# Altium PCB ScrollWheel.PcbDoc
Units mm, origin at the board's own origin, x right, y up, seen from the top; angles counter-clockwise.
Board outline 38 x 48.55 mm, 4 copper layers (Top Layer, Plane 1, Plane 2, Bottom Layer), stack 1.58 mm thick; 56 components, 31 nets, 220 pads, 122 vias.
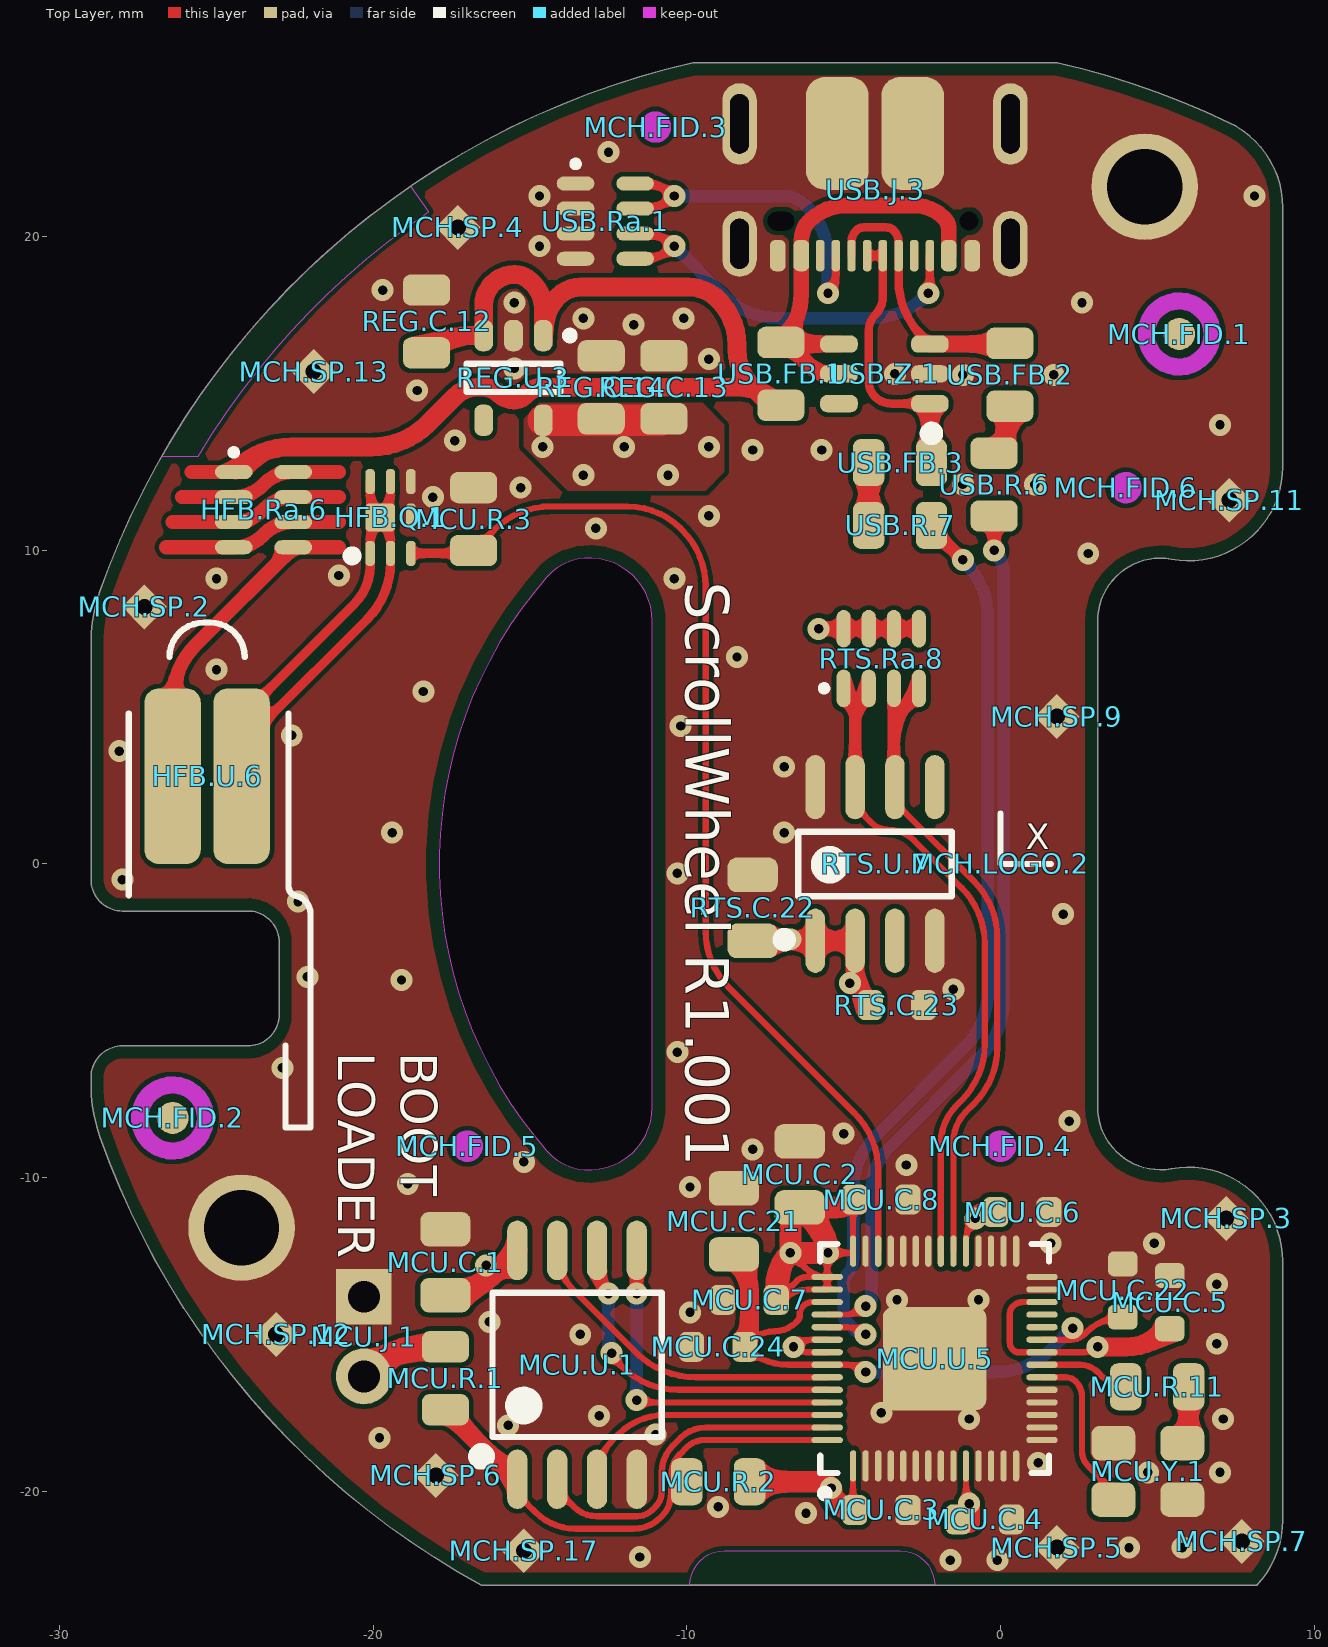
[diagram p0: Top Layer view]
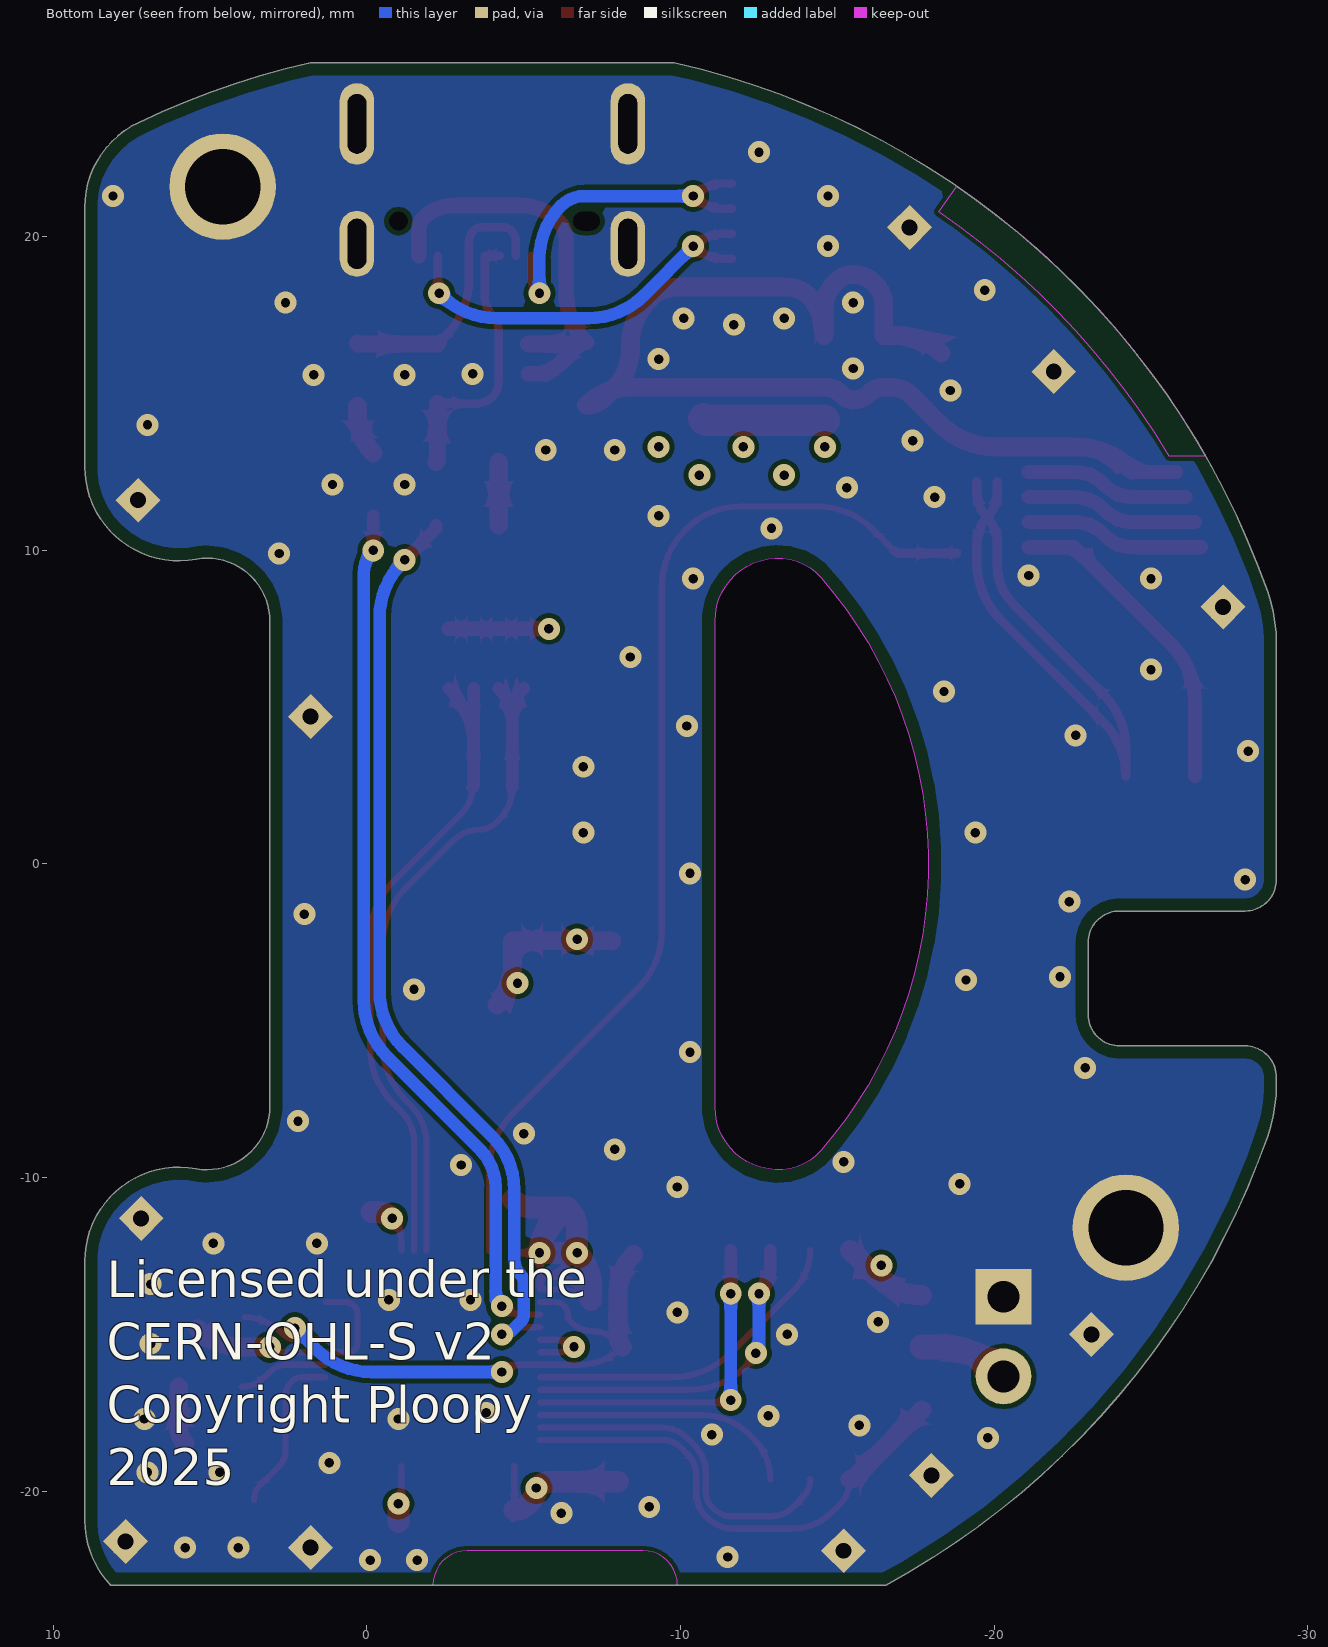
[diagram p1: Bottom Layer view, seen from below]
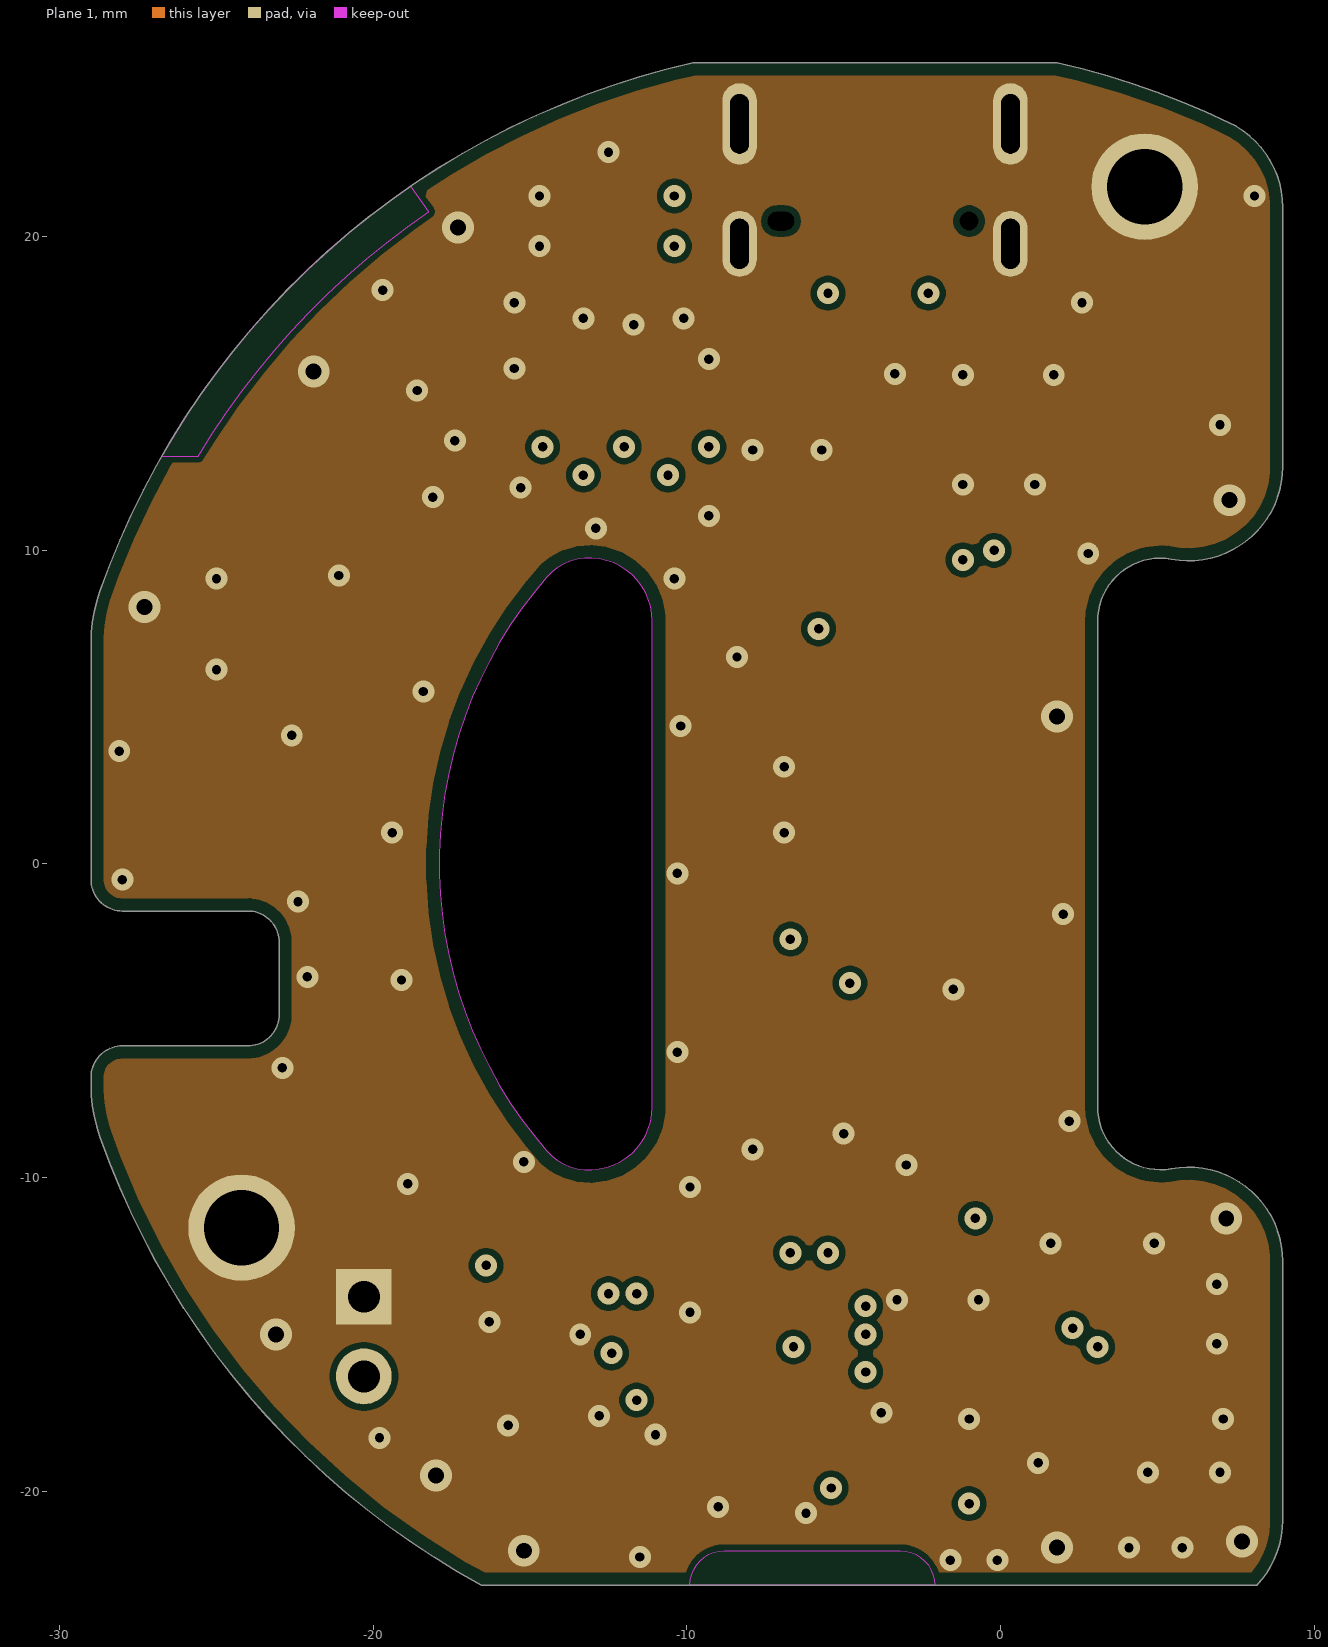
[diagram p2: Plane 1]
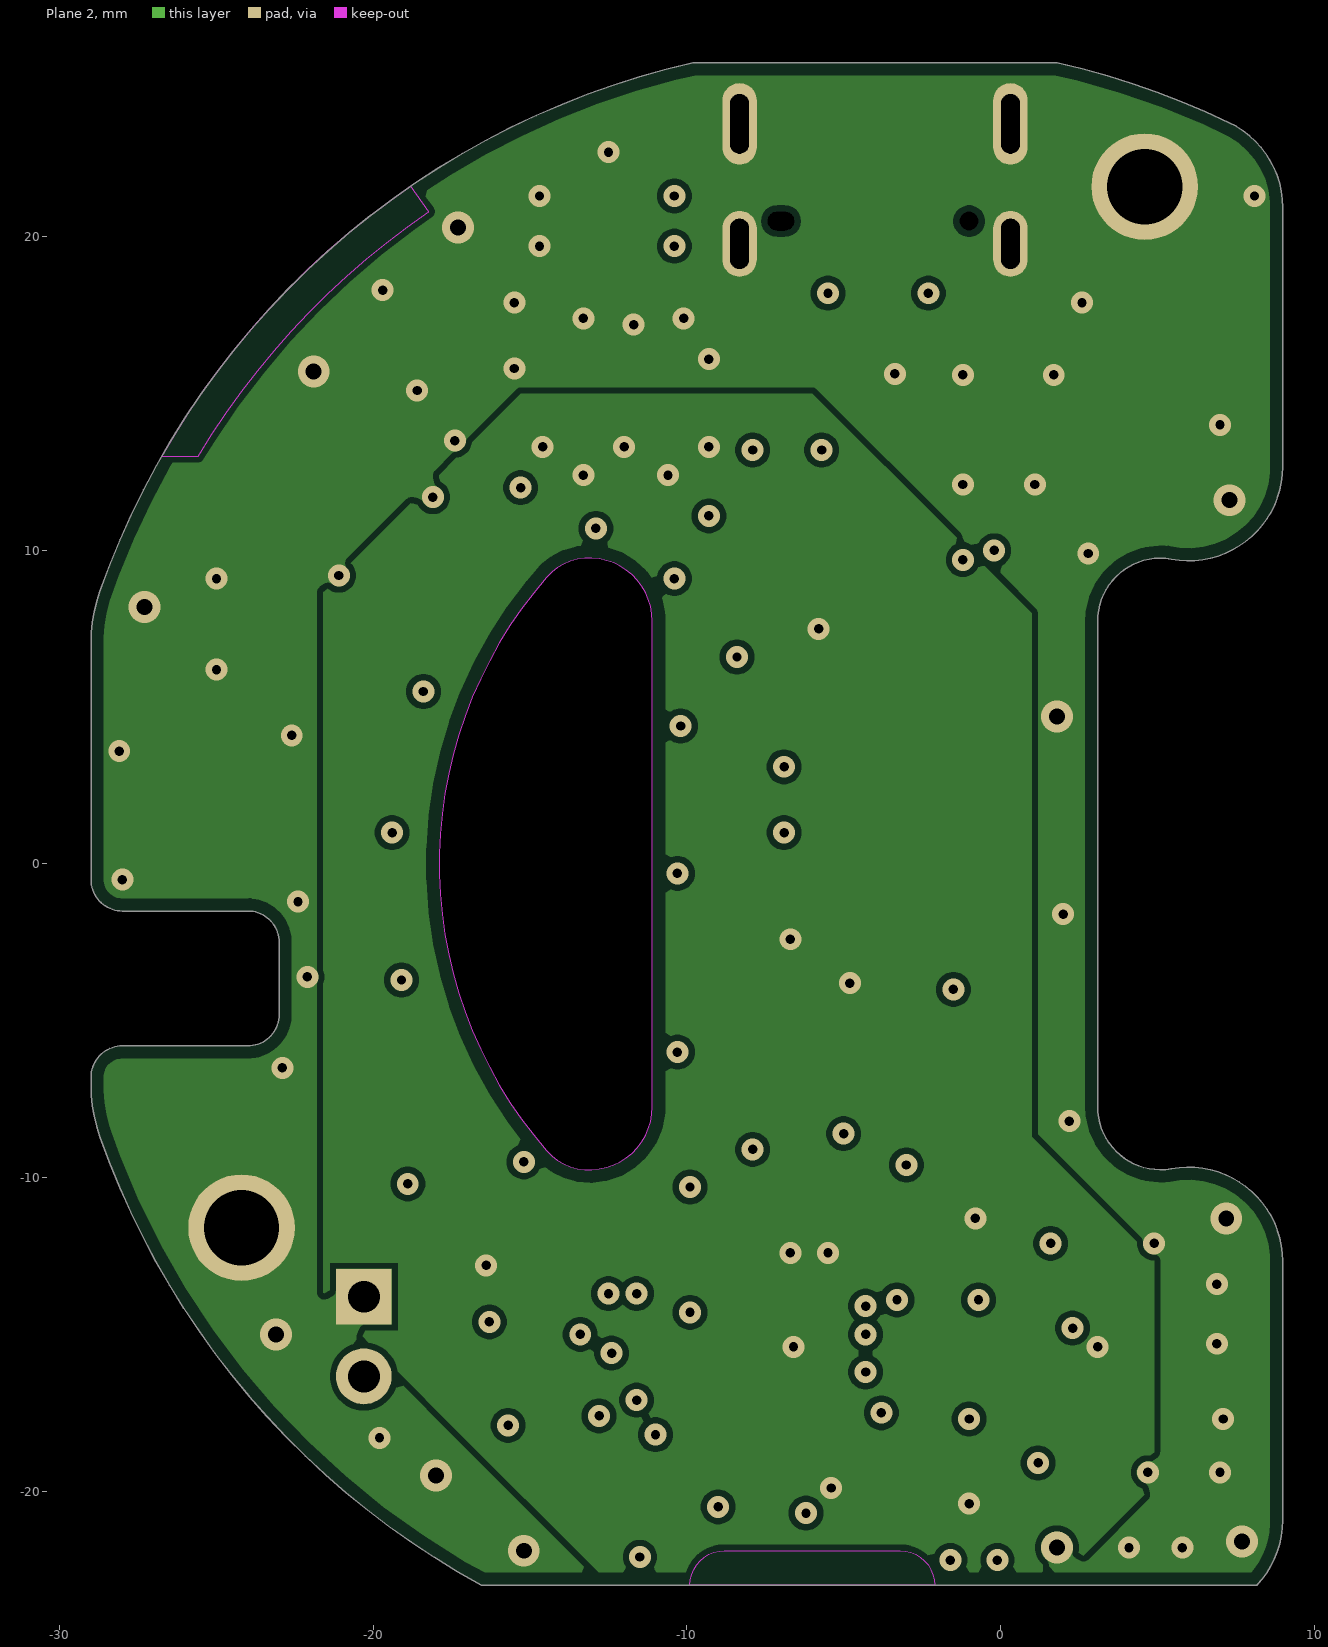
[diagram p3: Plane 2]

## Layer stack, top to bottom
Top Mask: solder mask 0.01, Solder Resist, Dk 3.5
Top Layer: signal copper 0.036
Dielectric 1: prepreg 0.127, FR-4, Dk 4.2
Plane 1: signal copper 0.036
Dielectric 4: core 1.182, Dk 4.2
Plane 2: signal copper 0.036
Dielectric 2: prepreg 0.127, Dk 4.2
Bottom Layer: signal copper 0.036
Bottom Solder: solder mask 0.01, Solder Resist, Dk 3.5

## Board outline
-28.717,-8.69 cw(c-24,-7.031) -29,-7.031 -29,-6.8 cw(c-28,-6.8) -28,-5.8 -24,-5.8 ccw(c-24,-4.8) -23,-4.8 -23,-2.5 ccw(c-24,-2.5) -24,-1.5 -28,-1.5 cw(c-28,-0.5) -29,-0.5 -29,7.031 cw(c-24,7.031) -28.717,8.69 cw(c-4,0) -9.802,25.55 1.802,25.55 cw(c-4,0) 7.293,23.641 cw(c6,20.934) 9,20.934 9,12.669 cw(c6,12.669) 5.451,9.72 ccw(c5.121,7.951) 5.262,9.745 ccw(c5.105,7.746) 3.1,7.746 3.1,-7.746 ccw(c5.105,-7.746) 5.262,-9.745 ccw(c5.121,-7.951) 5.451,-9.72 cw(c6,-12.669) 9,-12.669 9,-20.934 cw(c6,-20.934) 8.175,-23 -16.548,-23 cw(c-4,0)
cut-out: -14.478,-9.133 ccw(c-13.121,-7.951) -13.262,-9.745 ccw(c-13.105,-7.746) -11.1,-7.746 -11.1,7.746 ccw(c-13.105,7.746) -13.262,9.745 ccw(c-13.121,7.951) -14.478,9.133 ccw(c-4,0)

## Design rules (kind name [scope] priority, off if disabled: settings)
BoardOutlineClearance [(Not HasFootprint('SPARKGAP'))] p1: gap=0.4 ignorepadtopadclearanceinfootprint=FALSE except(0: Arc-SplitBarrior Arc-SplitContinuation Track-SplitBarrior Track-SplitContinuation Fill-SplitBarrior Fill-SplitContinuation Poly-SplitBarrior Poly-SplitContinuation Region-SplitBarrior Region-SplitContinuation Text-SplitBarrior Text-SplitContinuation)
Clearance "HighV Pads" [(InNetClass('HighV') AND (IsPad OR IsVia)) vs IsPad OR IsVia] p1: gap=0.4 ignorepadtopadclearanceinfootprint=FALSE except(0: Arc-Hole Track-Hole SMDPad-Hole THPad-Hole Via-Hole Fill-Hole Poly-Hole Region-Hole Text-Hole) // Establishes minimum clearance between bare pads that are high voltage, per IPC2221A Table 6-1, 51-100V, condition A6
Clearance Inter-Pad [IsPad vs IsPad] p2: gap=0.15 ignorepadtopadclearanceinfootprint=FALSE
Clearance "Spark Gaps" [InNetClass('Spark Gap') vs InNet('GND') And InPoly] p3: gap=0.635 ignorepadtopadclearanceinfootprint=FALSE except(0: Arc-Hole Track-Hole SMDPad-Hole THPad-Hole Via-Hole Fill-Hole Poly-Hole Region-Hole Text-Hole)
Clearance FIDs [Name like 'FID*'] p4: gap=1.016 ignorepadtopadclearanceinfootprint=FALSE except(0: Arc-Hole Track-Hole SMDPad-Hole THPad-Hole Via-Hole Fill-Hole Poly-Hole Region-Hole Text-Hole)
Clearance "Inner Planes" [InPoly AND OnMid] p5: gap=0.2 ignorepadtopadclearanceinfootprint=FALSE // Defines a larger clearance for planes on inner layers.
Clearance "All Planes" [InPoly] p6: gap=0.15 ignorepadtopadclearanceinfootprint=FALSE // Defines minimum clearance between planes on the same layer.
Clearance "Inner Layer Clearance" [OnMid vs OnMid] p7: gap=0.15 ignorepadtopadclearanceinfootprint=FALSE // We will give inner layers more spacing because they tend to be subject to stricter process limits.
Clearance [All] p8: gap=0.1 ignorepadtopadclearanceinfootprint=FALSE // 2 oz (70um) boards require at least 10mil spacing. We give a bit more to make sure things work well.
ComponentClearance "Terminal Block" [(HasFootprint('Phoenix 1933189 - Header')) vs (HasFootprint('Phoenix 1933189 - Header'))] p1: gap=-2.286 collisioncheckmode=3 verticalgap=0.254 showdistances=FALSE
ComponentClearance "FET/TP self Clearance" [(Name like 'Q*') Or (Name like 'TP*') vs (Name like 'Q*') Or (Name like 'TP*')] p2: gap=0.254 collisioncheckmode=3 verticalgap=0.254 showdistances=FALSE
ComponentClearance [Not ((Name like 'H*') Or (Name like 'FID*') Or (Name like 'SP*')) vs Not ((Name like 'H*') Or (Name like 'FID*') Or (Name like 'SP*'))] p3: gap=0.5 collisioncheckmode=3 verticalgap=0.5 showdistances=FALSE
DiffPairsRouting [All] p1: maxlimit=0.508 minlimit=0.279 mostfreqgap=0.381 toplayer_prefgap=0.279 toplayer_minwidth=0.279 toplayer_maxwidth=0.508 toplayer_prefwidth=0.381 midlayer2_mingap=0.305 midlayer2_minwidth=0.305 midlayer2_maxwidth=0.508 midlayer2_prefwidth=0.381 midlayer3_prefgap=0.279 midlayer3_minwidth=0.279 midlayer3_maxwidth=0.508 midlayer3_prefwidth=0.381 bottomlayer_prefgap=0.279 bottomlayer_minwidth=0.279 bottomlayer_maxwidth=0.508 bottomlayer_prefwidth=0.381 substack1={D919DD2D-F60F-4B9F-B5AE-F3E69D6E268F} toplayer_{d919dd2d-f60f-4b9f-b5ae-f3e69d6e268f}_minwidth=0.381 toplayer_{d919dd2d-f60f-4b9f-b5ae-f3e69d6e268f}_maxwidth=0.381 toplayer_{d919dd2d-f60f-4b9f-b5ae-f3e69d6e268f}_prefwidth=0.381 midlayer2_{d919dd2d-f60f-4b9f-b5ae-f3e69d6e268f}_minwidth=0.381 midlayer2_{d919dd2d-f60f-4b9f-b5ae-f3e69d6e268f}_maxwidth=0.381 midlayer2_{d919dd2d-f60f-4b9f-b5ae-f3e69d6e268f}_prefwidth=0.381 midlayer3_{d919dd2d-f60f-4b9f-b5ae-f3e69d6e268f}_minwidth=0.381 midlayer3_{d919dd2d-f60f-4b9f-b5ae-f3e69d6e268f}_maxwidth=0.381 midlayer3_{d919dd2d-f60f-4b9f-b5ae-f3e69d6e268f}_prefwidth=0.381 bottomlayer_{d919dd2d-f60f-4b9f-b5ae-f3e69d6e268f}_minwidth=0.381 bottomlayer_{d919dd2d-f60f-4b9f-b5ae-f3e69d6e268f}_maxwidth=0.381 bottomlayer_{d919dd2d-f60f-4b9f-b5ae-f3e69d6e268f}_prefwidth=0.381 maxuncoupledlength=12.7
Height [All] p1: minheight=0 maxheight=41 prefheight=12.7
HoleSize [All] p1: absolutevalues=TRUE maxlimit=100 minlimit=0.3 maxpercent=80.000 minpercent=20.000
HoleToHoleClearance [All] p1: gap=0.6 allowstackedmicrovias=TRUE
LayerPairs [All] p1: enforce=FALSE
MinimumSolderMaskSliver [All] p1: minsoldermaskwidth=0.09
NetAntennae [Not (HasFootprint('BALANCE_RESISTOR'))] p1: netantennaetolerance=0
PasteMaskExpansion [All] p1: expansion=-0.025
PlaneClearance [All] p1: clearance=0.3
PlaneConnect [All] p1: pad.planeconnectstyle=Relief pad.reliefexpansion=0.5 pad.reliefentries=4 pad.reliefconductorwidth=0.5 pad.reliefairgap=0.25 via.planeconnectstyle=Direct via.reliefexpansion=0.5 via.reliefentries=4 via.reliefconductorwidth=0.5 via.reliefairgap=0.25
PolygonConnect "PolygonConnect Spark Gap" [HasFootprint('SparkGap')] p1: connectstyle=Direct reliefconductorwidth=0.254 reliefentries=4 polygonreliefangle="90 Angle" airgapwidth=0.254 // This rule makes it so spark gaps get direct connections to ground planes.
PolygonConnect PolygonConnect_GND [All vs InNet('GND')] p2: connectstyle=Direct reliefconductorwidth=0.5 reliefentries=4 polygonreliefangle="90 Angle" airgapwidth=0.25 // This rule specifies all vias and holes connected to a GND plane have direct connections.
PolygonConnect [All] p3: connectstyle=Direct reliefconductorwidth=0.5 reliefentries=4 polygonreliefangle="90 Angle" airgapwidth=0.25
RoutingVias [All] p1: holewidth=0.5 width=1 viastyle="Through Hole" minholewidth=0.2 minwidth=0.5 maxholewidth=6 maxwidth=10
ShortCircuit [Not (InPadClass('TraceResistorPads')) vs Not (InPadClass('TraceResistorPads'))] p1: allowed=FALSE
SilkToBoardRegionClearance [All] p1 off:
SilkToSilkClearance [All] p1 off: silktosilkclearance=0.254
SilkToSolderMaskClearance SilkscreenOverComponentPads [IsPad] p1: minsilkscreentomaskgap=0.102 clearancetoexposedcopper=FALSE
SolderMaskExpansion SolderMaskExpansion_via [IsVia] p1: expansion=0.102 istentingtop=TRUE
SolderMaskExpansion [All] p2: expansion=0.076 istentingtop=FALSE
Width [All] p1: maxlimit=50.8 minlimit=0.1 preferedwidth=0.4 midlayer2_minwidth=0.35 midlayer3_minwidth=0.35 bottomlayer_minwidth=0.26 substack1={D919DD2D-F60F-4B9F-B5AE-F3E69D6E268F} toplayer_{d919dd2d-f60f-4b9f-b5ae-f3e69d6e268f}_minwidth=0.26 midlayer2_{d919dd2d-f60f-4b9f-b5ae-f3e69d6e268f}_minwidth=0.35 midlayer3_{d919dd2d-f60f-4b9f-b5ae-f3e69d6e268f}_minwidth=0.35 bottomlayer_{d919dd2d-f60f-4b9f-b5ae-f3e69d6e268f}_minwidth=0.26 minimp=50.000000 maximp=50.000000 favimp=50.000000
15 further rules are at their usual default settings.

## Classes and differential pairs
component class RTS: RTS.C.22 RTS.C.23 RTS.Ra.8 RTS.U.7
component class HFB: HFB.Q.1 HFB.Ra.6 HFB.U.6
component class USB: USB.FB.1 USB.FB.2 USB.FB.3 USB.J.3 USB.R.6 USB.R.7 USB.Ra.1 USB.Z.1
component class REG: REG.C.12 REG.C.13 REG.C.14 REG.U.3
component class MCU: MCU.C.1 MCU.C.2 MCU.C.3 MCU.C.4 MCU.C.5 MCU.C.6 MCU.C.7 MCU.C.8 MCU.C.21 MCU.C.22 MCU.C.24 MCU.J.1 MCU.R.1 MCU.R.2 MCU.R.3 MCU.R.11 MCU.U.1 MCU.U.5 MCU.Y.1
component class MCH: MCH.FID.1 MCH.FID.2 MCH.FID.3 MCH.FID.4 MCH.FID.5 MCH.FID.6 MCH.LOGO.2 MCH.SP.2 MCH.SP.3 MCH.SP.4 MCH.SP.5 MCH.SP.6 MCH.SP.7 MCH.SP.9 MCH.SP.11 MCH.SP.12 MCH.SP.13 MCH.SP.17

## Components (designator, comment, footprint, x,y, rotation, side; value= is the part's Value field where it differs from the comment)
HFB.Q.1 "CSD16301Q2" "CSD16301Q2 - SON65P200X80_HS-7M" -19.45,11.05 r90 top (schematic designator Q1)
HFB.Ra.6 "1206 Quad" "4x 1R 5% - CAC-80P320X160-8M" -23.5,11.3 r0 top value="1R 5%" (schematic designator Ra6)
HFB.U.6 "MOTOR-VIBRATORY" MOTOR-VIBRATORY -25,0.5 r90 top (schematic designator U6)
MCH.FID.1 "IPC-7351 Fiducial 1mm" FIDUCIAL_1.5 5.7,16.9 r90 top (schematic designator FID1)
MCH.FID.2 "IPC-7351 Fiducial 1mm" FIDUCIAL_1.5 -26.4,-8.1 r90 top (schematic designator FID2)
MCH.FID.3 "1mm Fiducial for OpenPNP" FIDUCIAL-NEW -11,23.5 r90 top (schematic designator FID3)
MCH.FID.4 "1mm Fiducial for OpenPNP" FIDUCIAL-NEW 0,-9 r90 top (schematic designator FID4)
MCH.FID.5 "1mm Fiducial for OpenPNP" FIDUCIAL-NEW -17,-9 r90 top (schematic designator FID5)
MCH.FID.6 "1mm Fiducial for OpenPNP" FIDUCIAL-NEW 4,12 r90 top (schematic designator FID6)
MCH.LOGO.2 "Coordinate system marker for assembly" "COORDINATE SYSTEM" 0,0 r0 top (schematic designator LOGO2)
MCH.SP.2 "Spark Gap" SparkGap -27.3,8.2 r90 top (schematic designator SP2)
MCH.SP.3 "Spark Gap" SparkGap 7.2,-11.3 r90 top (schematic designator SP3)
MCH.SP.4 "Spark Gap" SparkGap -17.3,20.3 r90 top (schematic designator SP4)
MCH.SP.5 "Spark Gap" SparkGap 1.8,-21.8 r90 top (schematic designator SP5)
MCH.SP.6 "Spark Gap" SparkGap -18,-19.5 r90 top (schematic designator SP6)
MCH.SP.7 "Spark Gap" SparkGap 7.7,-21.6 r90 top (schematic designator SP7)
MCH.SP.9 "Spark Gap" SparkGap 1.8,4.7 r90 top (schematic designator SP9)
MCH.SP.11 "Spark Gap" SparkGap 7.3,11.6 r90 top (schematic designator SP11)
MCH.SP.12 "Spark Gap" SparkGap -23.1,-15 r90 top (schematic designator SP12)
MCH.SP.13 "Spark Gap" SparkGap -21.9,15.7 r90 top (schematic designator SP13)
MCH.SP.17 "Spark Gap" SparkGap -15.2,-21.9 r90 top (schematic designator SP17)
MCU.C.1 "0805 X5R" "0805 - TALL" -17.7,-12.7 r0 top value="1uF 25V" (schematic designator C1)
MCU.C.2 "0805 X5R" "0805 - TALL" -6.4,-9.9 r0 top value="1uF 25V" (schematic designator C2)
MCU.C.3 "0603 X5R" "0603 capacitor - CAPC1608X06N" -3.8,-20.6 r90 top value="0.1uF 25V" (schematic designator C3)
MCU.C.4 "0603 X5R" "0603 capacitor - CAPC1608X06N" -0.5,-20.9 r90 top value="0.1uF 25V" (schematic designator C4)
MCU.C.5 "0603 X5R" "0603 capacitor - CAPC1608X06N" 5.4,-13.97 r180 top value="0.1uF 25V" (schematic designator C5)
MCU.C.6 "0603 X5R" "0603 capacitor - CAPC1608X06N" 0.7,-11.1 r90 top value="0.1uF 25V" (schematic designator C6)
MCU.C.7 "0603 X5R" "0603 capacitor - CAPC1608X06N" -8,-13.9 r270 top value="0.1uF 25V" (schematic designator C7)
MCU.C.8 "0603 X5R" "0603 capacitor - CAPC1608X06N" -3.8,-10.7 r90 top value="0.1uF 25V" (schematic designator C8)
MCU.C.21 "0805 X5R" "0805 - TALL" -8.5,-11.4 r0 top value="1uF 25V" (schematic designator C21)
MCU.C.22 "0603 X5R" "0603 capacitor - CAPC1608X06N" 3.9,-13.6 r180 top value="0.1uF 25V" (schematic designator C22)
MCU.C.24 "0603 X5R" "0603 capacitor - CAPC1608X06N" -9,-15.4 r270 top value="0.1uF 25V" (schematic designator C24)
MCU.J.1 "HEADER2" 2x1 -20.3,-13.8 r0 top (schematic designator J1)
MCU.R.1 "0805" 0805 -17.7,-16.4 r0 top value="1k 1%" (schematic designator R1)
MCU.R.2 "0805" 0805 -9,-19.7 r270 top value="10k 1%" (schematic designator R2)
MCU.R.3 "0805" 0805 -16.8,11 r180 top value="10k 1%" (schematic designator R3)
MCU.R.11 "0805" 0805 5,-16.67 r90 top value="1k 1%" (schematic designator R11)
MCU.U.1 "W25Q16JVSSIQ" "W25Q128JVS - SOIC127P790X216-8M" -13.5,-15.97 r90 top (schematic designator U1)
MCU.U.5 "RP2040" "RP2040 - QFN40P700X700X90_HS-57M" -2.1,-15.77 r90 top (schematic designator U5)
MCU.Y.1 "RH100-12.000-16-3030" RH100-12.000-16-3030 4.7,-19.37 r0 top (schematic designator Y1)
REG.C.12 "0805" 0805 -18.3,17.3 r0 top value="1uF 25V" (schematic designator C12)
REG.C.13 "0805" 0805 -10.73,15.2 r0 top value="10uF 25V" (schematic designator C13)
REG.C.14 "0805" 0805 -12.73,15.2 r0 top value="1uF 25V" (schematic designator C14)
REG.U.3 "AP2202K-3.3" "AP2202 - SOT95P270X145-5N" -15.53,15.5 r270 top (schematic designator U3)
RTS.C.22 "0805 X5R" "0805 - TALL" -7.9,-1.4 r0 top value="10uF 25V" (schematic designator C22)
RTS.C.23 "0603 X5R" "0603 capacitor - CAPC1608X06N" -3.3,-4.5 r90 top value="0.1uF 25V" (schematic designator C23)
RTS.Ra.8 "1206 Quad" "4x 10k 1% - CAC-80P320X160-8M" -3.8,6.55 r90 top value="10k 1%" (schematic designator Ra8)
RTS.U.7 "AS5600" AS5600 -4,0 r90 top (schematic designator U7)
USB.FB.1 "ACML-0805-601-T" 0805 -7,15.63 r0 top (schematic designator FB1)
USB.FB.2 "ACML-0805-601-T" 0805 0.3,15.6 r0 top (schematic designator FB2)
USB.FB.3 "ACML-0805-601-T" 0805 -3.2,12.8 r270 top (schematic designator FB3)
USB.J.3 "DX07S016JA1R1500" DX07S016JA1R1500 -4,22.4 r180 top (schematic designator J3)
USB.R.6 "0805" 0805 -0.2,12.1 r0 top value="22R 1%" (schematic designator R6)
USB.R.7 "0805" 0805 -3.2,10.8 r90 top value="22R 1%" (schematic designator R7)
USB.Ra.1 "1206 Quad" "4x 10k 1% - CAC-80P320X160-8M" -12.6,20.5 r0 top value="10k 1%" (schematic designator Ra1)
USB.Z.1 "IP4220CZ6,125" "PESD3V3S4UD - SOT95P275X110-6N" -3.7,15.63 r180 top (schematic designator Z1)

## Footprints (in the part's own frame and the unit in brackets; to place one, negate y for a bottom-side part, rotate by r counter-clockwise, add the part's x,y. Pads: shape width x height; smd on the part's side, far side on the other; paste and mask are expansions set on the pad)
2x1 [mil]
  rect 70x70 hole 40 paste-3897.64: 1(0,0)
  round 70 hole 40 paste-3897.64: 2(0,-100)
"4x 1R 5% - CAC-80P320X160-8M" [mm] "Chip Array, Concave, 8-Leads, Pitch 0.80mm,  Body 3.20x1.60mm,  IPC Low Density"
  oval 1.2x0.45 smd paste-99: 1(-0.95,1.2) 2(-0.95,0.4) 3(-0.95,-0.4) 4(-0.95,-1.2) 5(0.95,-1.2) 6(0.95,-0.4) 7(0.95,0.4) 8(0.95,1.2)
  silkscreen extent -1,1.78 -0.9,1.87, body extent -0.9,-1.7 0.9,1.7, height 0.6
"4x 10k 1% - CAC-80P320X160-8M" [mm] "Chip Array, Concave, 8-Leads, Pitch 0.80mm,  Body 3.20x1.60mm,  IPC Low Density"
  oval 1.2x0.45 smd paste-99: 1(-0.95,1.2) 2(-0.95,0.4) 3(-0.95,-0.4) 4(-0.95,-1.2) 5(0.95,-1.2) 6(0.95,-0.4) 7(0.95,0.4) 8(0.95,1.2)
  silkscreen extent -1,1.78 -0.9,1.87, body extent -0.9,-1.7 0.9,1.7, height 0.6
"0603 capacitor - CAPC1608X06N" [mm] "Chip Capacitor, 2-Leads, Body 1.60x0.80mm, IPC Medium Density"
  rrect50% 0.95x0.8 smd: 1(0,-0.85) 2(0,0.85)
  body extent -0.45,-0.85 0.45,0.85, height 0.6
0805 [mm] "Chip Capacitor, 2-Leads, Body 2.0x1.3mm, IPC Medium Density"
  rrect50% 1.5x1 smd paste+0: 1(0,1.002) 2(0,-1.002)
  body extent -0.72,-1.1 0.72,1.1, height 0.8
"0805 - TALL" [mm] "Same as 0805 footprint, but solder mask is adjusted to leave more paste behind for tall (>0.9mm) components like big caps, which tend to be solder-starved on the regular footprint."
  rrect50% 1.6x1.1 smd paste+0: 1(0,1.052) 2(0,-1.052)
  body extent -0.72,-1.1 0.72,1.1, height 0.8
"AP2202 - SOT95P270X145-5N" [mm] "SOT23, 5-Leads, Body 2.92x2.70mm, Pitch 0.95mm, IPC Medium Density"
  rrect80% 1x0.6 smd paste-0.04: 1(-1.35,0.95) 2(-1.35,0) 3(-1.35,-0.95) 4(1.35,-0.95) 5(1.35,0.95)
  silkscreen extent -1.47,-1.5 0.45,1.93, body extent -0.85,-1.52 0.85,1.52, height 1.45
AS5600 [mm] "SOIC, 8-Leads, Body 4.9x3.9mm (max), Pitch 1.27mm, IPC Medium Density"
  rrect100% 2.05x0.62 smd paste-0.04: 1(-2.45,1.905) 2(-2.45,0.635) 3(-2.45,-0.635) 4(-2.45,-1.905) 5(2.45,-1.905) 6(2.45,-0.635) 7(2.45,0.635) 8(2.45,1.905)
  silkscreen extent -2.54,-2.45 1.02,3.02, body extent -1.95,-2.45 1.95,2.45, height 1.75
"COORDINATE SYSTEM" [mm]
  silkscreen extent 0,0 1.6,1.6
"CSD16301Q2 - SON65P200X80_HS-7M" [mm] "SON, 6-Leads, Body 2.00x2.00mm, Pitch 0.65mm, Thermal Pad 0.95x0.89mm, IPC Low Density"
  rrect80% 0.8x0.3 smd paste-99 mask+0.06: D(-1.145,0) D(-1.145,0.65) D(1.145,0) D(1.145,0.65) G(-1.145,-0.65) S(0.05,-0.65) S(1.145,-0.65)
  rrect30% 0.9x0.95 smd paste-99 mask+0.06: D(0,0.325)
  silkscreen extent -1.27,1.18 -1.18,1.27, body extent -1.05,-1.05 1.05,1.05, height 0.8
DX07S016JA1R1500 [mm] "USB-C (USB TYPE-C) USB 2.0 Receptacle Connector 24 (16+8 Dummy) Position Surface Mount, Right Angle; Through Hole"
  rrect70% 0.5x1 smd paste-0.04 mask+0.05: 1(-3.1,3) 2(-2.35,3) 11(2.35,3) 12(3.1,3)
  rrect70% 0.27x1 smd paste-0.02 mask+0.05: 3(-1.75,3) 4(-1.25,3) 5(-0.75,3) 6(-0.25,3) 7(0.25,3) 8(0.75,3) 9(1.25,3) 10(1.75,3)
  rrect100% 1.1x2.6 hole 0.6 slot 1.9 at 90 deg paste-99 mask+0.1: SHELL(-4.32,-1.2) SHELL(4.32,-1.2)
  rrect100% 1.1x2.1 hole 0.6 slot 1.6 at 90 deg paste-99 mask+0.1: SHELL(-4.32,2.625) SHELL(4.32,2.625)
  rrect60% 2x3.6 smd paste-0.12 mask+0.05: SHELL(-1.2,-0.9) SHELL(1.2,-0.9)
  round 0 hole 0.6: ""(-3,1.9)
  round 0 hole 0.6 slot 0.85 at 0 deg: ""(3,1.9)
  body extent -4.47,-3.65 4.47,3.25, height 3.18
FIDUCIAL-NEW [mm]
  Top Layer keep-out circle w0.6: c0,0 r0.2
FIDUCIAL_1.5 [mil]
  round 40 smd paste-60 mask+30: 1(0,0)
  Top Layer keep-out circle w21.65: c0,0 r41.34
MOTOR-VIBRATORY [mm]
  rrect50% 5.6x1.8 smd paste-99 mask+0.07: 1(2.3,1.4) 2(2.3,-0.8)
  body extent -8.5,-2.75 7,2.65, height 4.05
"PESD3V3S4UD - SOT95P275X110-6N" [mm] "SOT23, 6-Leads, Body 2.90x2.75mm, Pitch 0.95mm, IPC Medium Density"
  rrect80% 1.2x0.55 smd paste-0.03 mask+0.085: 1(-1.45,0.95) 2(-1.45,0) 3(-1.45,-0.95) 4(1.45,-0.95) 5(1.45,0) 6(1.45,0.95)
  silkscreen extent -1.63,1.78 -1.38,2.02, body extent -0.85,-1.55 0.85,1.55, height 1.1
RH100-12.000-16-3030 [mm] "3.2mm x 2.5mm crystal"
  rrect50% 1.4x1.1 smd paste-0.1: 1(-1.1,-0.9) 2(1.1,-0.9) 3(1.1,0.9) 4(-1.1,0.9)
  body extent -1.6,-1.25 1.6,1.25, height 1
"RP2040 - QFN40P700X700X90_HS-57M" [mm] "QFN, 56-Leads, Body 7.00x7.00mm, Pitch 0.40mm, Thermal Pad 3.10x3.10mm, IPC Low Density"
  oval 1x0.2 smd paste-99 mask+0.05: 1(-3.425,2.6) 2(-3.425,2.2) 3(-3.425,1.8) 4(-3.425,1.4) 5(-3.425,1) 6(-3.425,0.6) 7(-3.425,0.2) 8(-3.425,-0.2) 9(-3.425,-0.6) 10(-3.425,-1) 11(-3.425,-1.4) 12(-3.425,-1.8) 13(-3.425,-2.2) 14(-3.425,-2.6) 29(3.425,-2.6) 30(3.425,-2.2) 31(3.425,-1.8) 32(3.425,-1.4) 33(3.425,-1) 34(3.425,-0.6) 35(3.425,-0.2) 36(3.425,0.2) 37(3.425,0.6) 38(3.425,1) 39(3.425,1.4) 40(3.425,1.8) 41(3.425,2.2) 42(3.425,2.6)
  oval 0.2x1 smd paste-99 mask+0.05: 15(-2.6,-3.425) 16(-2.2,-3.425) 17(-1.8,-3.425) 18(-1.4,-3.425) 19(-1,-3.425) 20(-0.6,-3.425) 21(-0.2,-3.425) 22(0.2,-3.425) 23(0.6,-3.425) 24(1,-3.425) 25(1.4,-3.425) 26(1.8,-3.425) 27(2.2,-3.425) 28(2.6,-3.425) 43(2.6,3.425) 44(2.2,3.425) 45(1.8,3.425) 46(1.4,3.425) 47(1,3.425) 48(0.6,3.425) 49(0.2,3.425) 50(-0.2,3.425) 51(-0.6,3.425) 52(-1,3.425) 53(-1.4,3.425) 54(-1.8,3.425) 55(-2.2,3.425) 56(-2.6,3.425)
  rrect20% 3.3x3.3 smd paste-99: 57(0,0)
  silkscreen extent -4.42,-3.65 3.65,3.65, body extent -3.5,-3.5 3.5,3.5, height 0.9
SparkGap [mil]
  rect 40x40 smd rot 45 paste-99 mask+4: 1(0,0)
  rect 40x40 smd far side rot 45 paste-99 mask+4: 1(0,0)
"W25Q128JVS - SOIC127P790X216-8M" [mm] "SOIC, 8-Leads, Body 5.28x5.28mm, Pitch 1.27mm, IPC Low Density"
  oval 1.9x0.65 smd paste-0.05: 1(-3.65,1.905) 2(-3.65,0.635) 3(-3.65,-0.635) 4(-3.65,-1.905) 5(3.65,-1.905) 6(3.65,-0.635) 7(3.65,0.635) 8(3.65,1.905)
  silkscreen extent -3.05,-2.7 2.3,3.17, body extent -2.7,-2.7 2.7,2.7, height 2.16

## Part data
HFB.Q.1: "25-V N-Channel Power MOSFET, 20mOhm, 2nC Qg"
HFB.Ra.6: library part "Quad Res 1R 5% 1206", "Chip resistor"
HFB.U.6: "A sort of bargain basement miscellaneous kind of vibration motor that can be found on AliExpress. It has springs for connecting directly to a PCB."
MCH.FID.1 MCH.FID.2: library part FIDUCIAL_1.5, PNP-A=1, PNP-da=0, PNP-dx=0, PNP-dy=0, PNP-FeedType=Fiducial, PNP-Level=1, PNP-Lv=1, PNP-Nzl=2, PNP-PlacePriority=0, PNP-Pt=0, PNP-TapeIndex=0, PNP-TapeWidth=0, PNP-Thk=1.02, PNP-TS=70, PNP-Type=MARK1, PNP-Voff=0, PNP-W=0, PNP-X=4, PNP-Y=4
MCH.FID.3 MCH.FID.4 MCH.FID.5 MCH.FID.6: library part FIDUCIAL_NEW, "This fiducial is designed to work with OpenPNP. It presents a circular pattern under the solder mask, to prevent glare issues from messing with the detection.", PNP-A=1, PNP-da=0, PNP-dx=0, PNP-dy=0, PNP-FeedType=Fiducial, PNP-Level=1, PNP-Lv=1, PNP-Nzl=2, PNP-PlacePriority=0, PNP-Pt=0, PNP-TapeIndex=0, PNP-TapeWidth=0, PNP-Thk=1.02, PNP-TS=70, PNP-Type=MARK1, PNP-Voff=0, PNP-W=0, PNP-X=4, PNP-Y=4
MCH.LOGO.2: library part CoordinateSystem
MCH.SP.2 MCH.SP.3 MCH.SP.4 MCH.SP.5 MCH.SP.6 MCH.SP.7 MCH.SP.9 MCH.SP.11 MCH.SP.12 MCH.SP.13 MCH.SP.17: "Open square pad for spark gapping", PNP-A=0, PNP-da=0, PNP-dx=0, PNP-dy=0, PNP-FeedType=Tape, PNP-Level=1, PNP-Lv=1, PNP-Nzl=2, PNP-PlacePriority=1, PNP-Pt=0, PNP-TapeIndex=1, PNP-TapeWidth=8, PNP-Thk=1, PNP-TS=70, PNP-Type=CHI, PNP-Voff=0, PNP-W=0, PNP-X=1, PNP-Y=1
MCU.C.1 MCU.C.2 MCU.C.21 REG.C.12 REG.C.14: library part "Cap 1uF 25V", "0805, X5R or better", Supplier Part Number 1=1276-1066-2-ND, Supplier 1=Digi-Key, Supplier 2=Digi-Key, Supplier Part Number 2=1276-1066-1-ND
  REG.C.12 REG.C.14: PNP-A=0, PNP-da=0, PNP-dx=0, PNP-dy=0, PNP-FeedType=Tape, PNP-Level=1, PNP-Lv=1, PNP-Nzl=2, PNP-PlacePriority=1, PNP-Pt=0, PNP-TapeIndex=1, PNP-TapeWidth=8, PNP-Thk=1.25, PNP-TS=70, PNP-Type=chi, PNP-Voff=0, PNP-W=0, PNP-X=2.00, PNP-Y=1.25
MCU.C.3 MCU.C.4 MCU.C.5 MCU.C.6 MCU.C.7 MCU.C.8 MCU.C.22 MCU.C.24 RTS.C.23: library part "Cap 0.1uF 25V", "0603, X5R or better", Supplier Part Number 1=1276-6840-2-ND, Supplier 1=Digi-Key
MCU.J.1: "2-pin 0.100\" header", Supplier Part Number 1=855-M20-9990245, Supplier 1=Mouser, Supplier 2=Digi-Key, Supplier Part Number 2=952-2261-ND
MCU.R.1 MCU.R.11: library part "Res 1k 1% 0805", "Chip resistor, 1/8W 100PPM", Supplier Part Number 1=RMCF0805FT1K00TR-ND, Supplier 1=Digi-Key
MCU.R.2 MCU.R.3: library part "Res 10k 1% 0805", "Chip resistor", Supplier Part Number 1=RMCF0805FT10K0TR-ND, Supplier 1=Digi-Key
MCU.U.1: Supplier Part Number 1=W25Q16JVSSIQ-ND, Supplier 1=Digi-Key
MCU.U.5: Supplier Part Number 1=49AJ8740, Supplier 1=Newark
MCU.Y.1: "12MHz Crystal 16pF 100 Ohms 4-SMD, No Lead (3.2mm x 2.5mm)", Supplier Part Number 1=XC2686CT-ND, Supplier 1=Digi-Key, Supplier 2=Mouser, Supplier Part Number 2=520-160-12-30B-AGMT
REG.C.13 RTS.C.22: library part "Cap 10uF 25V", "0805, X5R or better", Supplier Part Number 1=81-GRM21BR61E106KA3L, Supplier 1=Mouser, Supplier 2=Digi-Key, Supplier Part Number 2=490-5523-1-ND
  REG.C.13: PNP-A=0, PNP-da=0, PNP-dx=0, PNP-dy=0, PNP-FeedType=Tape, PNP-Level=1, PNP-Lv=1, PNP-Nzl=2, PNP-PlacePriority=1, PNP-Pt=0, PNP-TapeIndex=1, PNP-TapeWidth=8, PNP-Thk=1.25, PNP-TS=70, PNP-Type=chi, PNP-Voff=0, PNP-W=0, PNP-X=2.00, PNP-Y=1.25
REG.U.3: "3.3V 150mA LDO regulator", Supplier Part Number 1=621-AP2202K-3.3TRG1, PNP-A=90, PNP-da=0, PNP-dx=0, PNP-dy=0, PNP-FeedType=Tape, PNP-Level=1, PNP-Lv=26, PNP-Nzl=2, PNP-PlacePriority=3, PNP-Pt=0, PNP-TapeIndex=1, PNP-TapeWidth=8, PNP-Thk=1, PNP-TS=90, PNP-Type=CHP, PNP-Voff=0, PNP-W=0, PNP-X=2.9, PNP-Y=1.3, Supplier 1=Mouser, Supplier 2=Digi-Key, Supplier 3=Arrow, Supplier Part Number 2=AP2202K-3.3TRG1DICT-ND, Supplier Part Number 3=PWagzdsTFFHKE_U17B45SP-NtndBrheJIaI5hB7gHD0ZVywxIBNyoAQstvnyfZZ0
RTS.Ra.8 USB.Ra.1: library part "Quad Res 10k 1% 1206", "Chip resistor"
RTS.U.7: "Magnetic rotation sensor, PWM output", Supplier Part Number 1=JxJW4JDkv1L1ylkwpNJcAP-as8OSojp580yXT3MgaiM, Supplier 1=Arrow, Supplier 2=Digi-Key, Supplier Part Number 2=AS5600-ASOMCT-ND
USB.FB.1 USB.FB.2 USB.FB.3: "FERRITE BEAD 600 OHM 0805 1LN", Supplier Part Number 1=535-12556-1-ND, PNP-A=0, PNP-da=0, PNP-dx=0, PNP-dy=0, PNP-FeedType=Tape, PNP-Level=1, PNP-Lv=1, PNP-Nzl=2, PNP-PlacePriority=1, PNP-Pt=0, PNP-TapeIndex=1, PNP-TapeWidth=8, PNP-Thk=0.55, PNP-TS=70, PNP-Type=chi, PNP-Voff=0, PNP-W=0, PNP-X=2.00, PNP-Y=1.25, Supplier 1=Digi-Key
USB.J.3: "USB-C (USB TYPE-C) USB 2.0 Receptacle Connector 24 (16+8 Dummy) Position Surface Mount, Right Angle; Through Hole", Supplier Part Number 1=670-DX07S016JA1R1500CT-ND, Supplier 1=Digi-Key, Supplier 2=Mouser, Supplier Part Number 2=656-DX07S016JA1R1500
USB.R.6 USB.R.7: library part "Res 22R 1% 0805", "Chip resistor", Supplier Part Number 1=RMCF0805FT22R0CT-ND, PNP-A=0, PNP-da=0, PNP-dx=0, PNP-dy=0, PNP-FeedType=Tape, PNP-Level=1, PNP-Lv=1, PNP-Nzl=2, PNP-PlacePriority=1, PNP-Pt=0, PNP-TapeIndex=1, PNP-TapeWidth=8, PNP-Thk=0.55, PNP-TS=70, PNP-Type=chi, PNP-Voff=0, PNP-W=0, PNP-X=2.00, PNP-Y=1.25, Supplier 1=Digi-Key, Supplier 2=Arrow, Supplier Part Number 2=RMCF0805FT22R0
USB.Z.1: "TVS DIODE 5.5V 6TSOP (Low capacitance, USB)", PNP-A=270, PNP-da=0, PNP-dx=0, PNP-dy=0, PNP-FeedType=Tape, PNP-Level=1, PNP-Lv=26, PNP-Nzl=2, PNP-PlacePriority=3, PNP-Pt=0, PNP-TapeIndex=1, PNP-TapeWidth=8, PNP-Thk=1, PNP-TS=90, PNP-Type=CHP, PNP-Voff=0, PNP-W=0, PNP-X=2.9, PNP-Y=1.3

## Free pads (board coordinates)
  round 3.4 hole 2.4: 4(-24.2,-11.6) 4(4.6,21.6)

## Via types
v1: diameter 0.7, hole 0.3, Top Layer to Bottom Layer, tented both sides, 111 vias
v2: diameter 1.016, hole 0.508, Top Layer to Bottom Layer, tented both sides, 11 vias

## Nets (pads, with @x,y where several pads share a name; then routed paths per layer and width w, separated by ;. In a path a pad name is that pad's centre, name@x,y a point inside that pad or via, vN(x,y) a via of type N, cw(c..) or ccw(c..) an arc to the next point about the centre after c; other vN are vias at no path point)
1V1: MCU.C.21.2 MCU.C.22.2 MCU.C.24.2 MCU.U.5.23 MCU.U.5.45 MCU.U.5.50 | length 20.3
  Top Layer w0.2: MCU.U.5.45 -5.987,-13.97 ccw(c-5.987,-14.413) -6.3,-14.1 ccw(c-6.059,-14.341) -6.4,-14.341 -6.4,-14.4 cw(c-6.641,-14.4) -6.471,-14.571 -6.517,-14.617 cw(c-7.2,-13.934) -7.2,-14.9 ccw(c-7.2,-15.986) -7.968,-15.218 -8.15,-15.4 ccw(c-6.774,-14.024) -6.774,-15.97 MCU.U.5.50 -4.855,-15.97 cw(c-4.855,-16.755) v1(-4.3,-16.2) ; MCU.U.5.23 2.252,-15.17 ccw(c2.252,-14.552) 2.689,-14.989 2.753,-14.925 cw(c3.9,-16.071) MCU.C.22.2
  Top Layer w0.6: MCU.C.21.2 cw(c-9.707,-13.66) -8,-13.66 -8,-15.038 cw(c-8.512,-15.038) MCU.C.24.2@-8.15,-15.4
  Bottom Layer w0.4: v1(-4.3,-16.2) -0.152,-16.2 ccw(c-0.152,-13.66) 1.644,-15.456 v1(2.3,-14.8)
3V3: MCU.C.1.2 MCU.C.2.2 MCU.C.3.2 MCU.C.4.2 MCU.C.5.2 MCU.C.6.2 MCU.C.7.2 MCU.C.8.2 MCU.R.2.1 MCU.U.1.8 MCU.U.5.1 MCU.U.5.10 MCU.U.5.22 MCU.U.5.26 MCU.U.5.33 MCU.U.5.42 MCU.U.5.43 MCU.U.5.44 MCU.U.5.48 MCU.U.5.49 REG.C.13.2 REG.C.14.2 REG.U.3.5 RTS.C.22.2 RTS.C.23.2 RTS.Ra.8.5 RTS.Ra.8.6 RTS.Ra.8.7 RTS.Ra.8.8 RTS.U.7.1 RTS.U.7.2 | length 51.2
  Top Layer w0.2: v1(-6.7,-12.4) -6.216,-12.884 ccw(c-5.525,-12.193) MCU.U.5.43 ; MCU.U.5.49 -6.189,-15.57 cw(c-6.189,-14.989) v1(-6.6,-15.4) cw(c-6.045,-15.955) -6.045,-15.17 MCU.U.5.48 ; -5.223,-20.327 -5.162,-20.388 ; -5.162,-20.388 ccw(c-4.65,-19.876) MCU.C.3.2@-4.7,-20.598 ; MCU.U.5.1 MCU.C.3.2@-4.7,-20.598 ; MCU.C.8.2 ccw(c-4.529,-10.821) -4.7,-10.821 MCU.U.5.42 cw(c-4.832,-12.213) -4.832,-12.4 v1(-5.5,-12.4) ccw(c-5.44,-12.46) -5.525,-12.46 MCU.U.5.43 ; MCU.C.3.2@-4.65,-20.9 cw(c-4.529,-20.779) -4.7,-20.779 MCU.C.3.2@-4.7,-20.598 ; MCU.C.3.2 cw(c-4.65,-19.876) MCU.C.3.2@-4.7,-20.598 ; MCU.U.5.10 -1.1,-20.159 ccw(c-0.759,-20.159) v1(-1,-20.4) ; MCU.U.5.33 -1.1,-12.024 cw(c-0.076,-12.024) v1(-0.8,-11.3) ; MCU.U.5.26 0.713,-13.97 ccw(c0.713,-14.413) 0.4,-14.1 ccw(c0.641,-14.341) 0.3,-14.341 0.3,-15.259 ccw(c0.641,-15.259) 0.4,-15.5 ccw(c0.569,-15.331) 0.569,-15.57 MCU.U.5.22 2.689,-15.57 ccw(c2.689,-14.989) v1(3.1,-15.4) ; MCU.U.5.43 -6.187,-13.17 ccw(c-6.187,-13.613) -6.5,-13.3 -6.844,-13.644 ccw(c-6.588,-13.9) -6.95,-13.9 cw(c-6.154,-14.696) -6.154,-13.57 MCU.U.5.44 MCU.U.5.43
  Top Layer w0.45: v1(-5.8,7.5) RTS.Ra.8.8 RTS.Ra.8.7 RTS.Ra.8.6 RTS.Ra.8.5
  Top Layer w0.6: RTS.C.22.2@-7.8,-2.452 -7.798,-2.45 RTS.U.7.1 RTS.U.7.2 -4.635,-3.329 ccw(c-2.979,-3.329) RTS.C.23.2 ; v1(3.1,-15.4) 4,-15.4 ccw(c4,-13.42) MCU.C.5.2
  Top Layer w0.65: MCU.C.1.2 ccw(c-17.7,-11.67) -16.227,-13.142 MCU.U.1.8
  Top Layer w0.7: MCU.R.2.1 -5.883,-19.7 cw(c-5.883,-20.383) v1(-5.4,-19.9) ccw(c-4.796,-19.9) -5.223,-20.327 -5.162,-20.388 -5.13,-20.42 ccw(c-4.7,-19.991) MCU.C.3.2@-4.7,-20.598 ; MCU.C.7.2 -7.15,-13.486 cw(c-5.614,-13.486) v1(-6.7,-12.4) ; MCU.C.8.2 cw(c-5.259,-10.091) -5.259,-10.952 MCU.C.2.2 ; MCU.C.4.2@-1,-20.979 v1(-1,-20.4) ; v1(-0.8,-11.3) cw(c-0.317,-11.783) -0.317,-11.1 MCU.C.6.2 ; v1(-6.7,-12.4) v1(-5.5,-12.4) ccw(c-6.822,-12.4) -5.887,-11.465 MCU.C.2.2 ; v1(-6.7,-12.4) -6.7,-11.677 cw(c-5.676,-11.677) MCU.C.2.2
  Top Layer w1: REG.U.3.5 -10.845,14.15 ccw(c-10.845,14.313) REG.C.13.2
  other v1: -16.4,-12.8 -4.8,-3.8 -6.7,-2.4 -13.3,12.4 -10.6,12.4 -14.6,13.3 -12,13.3 -9.3,13.3
GND: HFB.Q.1.S MCH.SP.2.1 MCH.SP.3.1 MCH.SP.4.1 MCH.SP.5.1 MCH.SP.6.1 MCH.SP.7.1 MCH.SP.9.1 MCH.SP.11.1 MCH.SP.12.1 MCH.SP.13.1 MCH.SP.17.1 MCU.C.1.1 MCU.C.2.1 MCU.C.3.1 MCU.C.4.1 MCU.C.5.1 MCU.C.6.1 MCU.C.7.1 MCU.C.8.1 MCU.C.21.1 MCU.C.22.1 MCU.C.24.1 MCU.J.1.1 MCU.R.3.2 MCU.U.1.4 MCU.U.5.2 MCU.U.5.3 MCU.U.5.4 MCU.U.5.5 MCU.U.5.6 MCU.U.5.7 MCU.U.5.8 MCU.U.5.9 MCU.U.5.11 MCU.U.5.12 MCU.U.5.13 MCU.U.5.14 MCU.U.5.15 MCU.U.5.16 MCU.U.5.17 MCU.U.5.18 MCU.U.5.19 MCU.U.5.27 MCU.U.5.28 MCU.U.5.29 MCU.U.5.30 MCU.U.5.31 MCU.U.5.32 MCU.U.5.36 MCU.U.5.37 MCU.U.5.38 MCU.U.5.39 MCU.U.5.41 MCU.U.5.57 MCU.Y.1.2 MCU.Y.1.4 pad.4 REG.C.12.1 REG.C.13.1 REG.C.14.1 REG.U.3.2 RTS.C.22.1 RTS.C.23.1 RTS.U.7.4 RTS.U.7.8 USB.J.3.1 USB.J.3.12 USB.J.3.SHELL USB.Ra.1.1 USB.Ra.1.2 USB.Ra.1.3 USB.Ra.1.4 USB.Z.1.2
  other v1: -1.6,-22.2 -0.1,-22.2 -11.5,-22.1 4.1,-21.8 5.8,-21.8 -6.2,-20.7 -9,-20.5 4.7,-19.4 7,-19.4 1.2,-19.1 -19.8,-18.3 -11,-18.2 -15.7,-17.9 -1,-17.7 7.1,-17.7 -12.8,-17.6 -3.8,-17.5 6.9,-15.3 -13.4,-15 -16.3,-14.6 -9.9,-14.3 -3.3,-13.9 -0.7,-13.9 6.9,-13.4 1.6,-12.1 4.9,-12.1 -9.9,-10.3 -18.9,-10.2 -3,-9.6 -15.2,-9.5 -7.9,-9.1 -5,-8.6 2.2,-8.2 -22.9,-6.5 -10.3,-6 -1.5,-4 -19.1,-3.7 -22.1,-3.6 2,-1.6 -22.4,-1.2 -28,-0.5 -10.3,-0.3 -19.4,1 -6.9,1 -6.9,3.1 -28.1,3.6 -22.6,4.1 -10.2,4.4 -18.4,5.5 -25,6.2 -8.4,6.6 -25,9.1 -10.4,9.1 -21.1,9.2 2.8,9.9 -12.9,10.7 -9.3,11.1 -18.1,11.7 -15.3,12 -1.2,12.1 1.1,12.1 -7.9,13.2 -5.7,13.2 -17.4,13.5 7,14 -18.6,15.1 -1.2,15.6 1.7,15.6 -3.369,15.631 -15.5,15.8 -9.3,16.1 -11.7,17.2 -13.3,17.4 -10.1,17.4 -15.5,17.9 2.6,17.9 -19.7,18.3 -14.7,19.7 -14.7,21.3 8.1,21.3 -12.5,22.7
  other v2: -15.2,-21.9 1.8,-21.8 7.7,-21.6 -18,-19.5 -23.1,-15 7.2,-11.3 1.8,4.7 -27.3,8.2 7.3,11.6 -21.9,15.7 -17.3,20.3
NetHFB.Q.1_D: HFB.Q.1.D HFB.U.6.2 | length 22.4
  Top Layer w0.3: HFB.Q.1.D@-20.1,12.195 -20.1,11.835 ccw(c-18.99,11.835) HFB.Q.1.D@-19.775,11.05 ; HFB.Q.1.D@-19.45,12.195 -19.45,11.835 cw(c-20.56,11.835) HFB.Q.1.D@-19.775,11.05 ; HFB.Q.1.D@-19.775,11.05 cw(c-20.56,10.265) -19.45,10.265 -19.45,9.905 -19.45,9.602 cw(c-21.99,9.602) -20.194,7.806 -23.493,4.507 ccw(c-21.786,2.8) HFB.U.6.2 -24.2,3.648 cw(c-21.66,3.648) -23.456,5.444 -20.6,8.3 ccw(c-21.807,9.507) -20.1,9.507 -20.1,9.905 -20.1,10.265 cw(c-18.99,10.265) HFB.Q.1.D@-19.775,11.05
NetHFB.Q.1_G: HFB.Q.1.G MCU.R.3.1 MCU.U.5.40 | length 34.6
  Top Layer w0.2: MCU.R.3.1 -16.142,10.656 cw(c-14.345,8.86) -14.345,11.4 -11.89,11.4 cw(c-11.89,9.01) -10.2,10.7 -10.144,10.644 cw(c-11.94,8.848) -9.4,8.848 -9.4,-2.148 ccw(c-6.86,-2.148) -8.656,-3.944 -4.644,-7.956 cw(c-6.44,-9.752) -3.9,-9.752 MCU.U.5.40
  Top Layer w0.3: HFB.Q.1.G -17.024,9.905 ccw(c-17.024,10.221) MCU.R.3.1
NetHFB.Ra.6_1: HFB.Ra.6.1 REG.C.12.2 REG.U.3.1 REG.U.3.3 USB.FB.1.2 | length 37.6
  Top Layer w0.45: -25.8,12.5 HFB.Ra.6.1
  Top Layer w0.6: HFB.Ra.6.1@-24.394,12.556 cw(c-22.598,10.76) -22.598,13.3 -20.052,13.3 ccw(c-20.052,15.84) -18.256,14.044 -17.383,14.917 cw(c-16.7,14.234) -16.7,15.2 -16.483,15.2 cw(c-16.483,14.517) -16,15 ccw(c-15.517,15.483) -15.517,14.8 -15.5,14.8 ccw(c-15.5,15.283) -15.159,14.941 -15.1,15 cw(c-14.617,14.517) -14.617,15.2 -8.382,15.2 cw(c-8.382,13.245) -7.816,15.116 ; REG.C.12.2 cw(c-16.966,14.964) -16.966,16.85 REG.U.3.3 -16.48,17.824 cw(c-15.524,17.824) -16.2,18.5 -16.183,18.517 cw(c-15.5,17.834) -15.5,18.8 cw(c-15.5,18.076) -14.988,18.588 -14.9,18.5 cw(c-15.673,17.727) -14.58,17.727 REG.U.3.1@-14.58,16.942 ; REG.U.3.1 REG.U.3.1@-14.58,16.942 ; REG.U.3.1@-14.58,16.942 cw(c-12.942,16.942) -14.1,18.1 cw(c-13.376,17.376) -13.376,18.4 -9.966,18.4 cw(c-9.966,17.034) -9,18 cw(c-10.449,16.551) -8.4,16.551 -8.4,16.4 ccw(c-6.71,16.4) -7.905,15.205 -7.816,15.116 ; -7.816,15.116 cw(c-8.382,13.245) USB.FB.1.2 cw(c-7,15.418) -7.559,14.859 -7.816,15.116
NetHFB.Ra.6_2: HFB.Ra.6.2 HFB.Ra.6.8 | length 5.2
  Top Layer w0.45: -26.1,11.7 HFB.Ra.6.2 ccw(c-24.45,13.028) -23.511,12.089 -23.489,12.111 cw(c-22.55,11.172) HFB.Ra.6.8 -21.1,12.5
NetHFB.Ra.6_3: HFB.Ra.6.3 HFB.Ra.6.7 | length 5.5
  Top Layer w0.45: -26.4,10.9 HFB.Ra.6.3 ccw(c-24.45,12.228) -23.511,11.289 -23.489,11.311 cw(c-22.55,10.372) HFB.Ra.6.7 -21.1,11.7
NetHFB.Ra.6_4: HFB.Ra.6.4 HFB.Ra.6.6 | length 5.7
  Top Layer w0.45: -26.6,10.1 HFB.Ra.6.4 ccw(c-24.45,11.428) -23.511,10.489 -23.489,10.511 cw(c-22.55,9.572) HFB.Ra.6.6 -21.1,10.9
NetHFB.Ra.6_5: HFB.Ra.6.5 HFB.U.6.1 | length 10.2
  Top Layer w0.45: HFB.U.6.1 -26.4,5.198 cw(c-23.86,5.198) -25.656,6.994 HFB.Ra.6.5 -21.1,10.1
NetMCU.J.1_2: MCU.J.1.2 MCU.R.1.1 | length 2.9
  Top Layer w0.8: MCU.J.1.2 -20.102,-16.142 cw(c-18.305,-17.938) -18.305,-15.398 MCU.R.1.1
NetMCU.R.1_2: MCU.R.1.2 MCU.R.2.2 MCU.U.1.1 MCU.U.5.56 | length 15.7
  Top Layer w0.2: MCU.U.1.1 ccw(c-14.259,-19.62) -15.069,-20.431 -14.834,-20.666 ccw(c-13.544,-19.375) -13.544,-21.2 -11.7,-21.2 ccw(c-11.7,-19.993) -10.846,-20.846 -10.8,-20.8 ccw(c-11.524,-20.076) -10.5,-20.076 -10.5,-19.5 cw(c-9.534,-19.5) -10.217,-18.817 -10,-18.6 cw(c-9.445,-19.155) -9.445,-18.37 -7.262,-18.37 MCU.U.5.56
  Top Layer w0.6: MCU.R.1.2 -15.537,-19.566 ccw(c-15.405,-19.434) MCU.U.1.1
NetMCU.R.11_1: MCU.R.11.1 MCU.U.5.21 | length 2.9
  Top Layer w0.2: MCU.U.5.21 2.545,-15.97 cw(c2.545,-16.755) 3.1,-16.2 3.268,-16.368 ccw(c3.998,-15.638) MCU.R.11.1
NetMCU.R.11_2: MCU.R.11.2 MCU.Y.1.3 | length 1.9
  Top Layer w0.6: MCU.Y.1.3 ccw(c5.311,-17.982) 6.002,-17.982 MCU.R.11.2
NetMCU.U.1_2: MCU.U.1.2 MCU.U.5.55 | length 11.1
  Top Layer w0.2: MCU.U.1.2 ccw(c-13.302,-19.62) -13.891,-20.209 -13.6,-20.5 ccw(c-12.876,-19.776) -12.876,-20.8 -11.6,-20.8 ccw(c-11.6,-20.076) -11.088,-20.588 -11,-20.5 ccw(c-11.483,-20.017) -10.8,-20.017 -10.8,-19.4 cw(c-9.593,-19.4) -10.447,-18.547 -10.2,-18.3 cw(c-9.404,-19.096) -9.404,-17.97 -7.179,-17.97 MCU.U.5.55
NetMCU.U.1_3: MCU.U.1.3 MCU.U.5.54 | length 8.5
  Top Layer w0.2: MCU.U.1.3 cw(c-11.042,-19.62) -12.331,-18.331 -12.2,-18.2 cw(c-10.679,-19.721) -10.679,-17.57 MCU.U.5.54
NetMCU.U.1_5: MCU.U.1.5 MCU.U.5.53 | length 10.9
  Top Layer w0.2: v1(-11.6,-17.1) ccw(c-11.431,-16.931) -11.431,-17.17 MCU.U.5.53
  Top Layer w0.4: v1(-11.6,-13.7) -11.6,-12.325 MCU.U.1.5
  Bottom Layer w0.4: v1(-11.6,-17.1) v1(-11.6,-13.7)
NetMCU.U.1_6: MCU.U.1.6 MCU.U.5.52 | length 10.7
  Top Layer w0.2: v1(-12.4,-15.6) -12.4,-15.7 -12.074,-16.026 ccw(c-10.278,-14.23) -10.278,-16.77 MCU.U.5.52
  Top Layer w0.4: MCU.U.1.6 -12.865,-12.819 ccw(c-11.619,-12.819) v1(-12.5,-13.7)
  Bottom Layer w0.26: v1@-12.5,-15.5 v1(-12.4,-15.6)
  Bottom Layer w0.4: v1@-12.5,-15.5 v1(-12.5,-13.7)
NetMCU.U.1_7: MCU.U.1.7 MCU.U.5.51 | length 10.5
  Top Layer w0.2: MCU.U.1.7 ccw(c-12.337,-12.32) -13.608,-13.592 -11.624,-15.576 ccw(c-9.706,-13.658) -9.706,-16.37 MCU.U.5.51
NetMCU.U.5_20: MCU.U.5.20 MCU.Y.1.1 | length 5.3
  Top Layer w0.2: MCU.U.5.20 2.087,-16.37 cw(c2.087,-16.813) 2.4,-16.5 cw(c1.917,-16.983) 2.6,-16.983 2.6,-18.717 ccw(c3.283,-18.717) 2.8,-19.2 3.409,-19.809 cw(c2.948,-20.27) MCU.Y.1.1
NetMCU.U.5_34: MCU.U.5.34 RTS.Ra.8.3 RTS.Ra.8.4 RTS.U.7.6 | length 21.6
  Top Layer w0.2: RTS.U.7.6 ccw(c-2.194,2.45) -3.022,1.622 -0.844,-0.556 cw(c-2.64,-2.352) -0.1,-2.352 -0.1,-5.848 cw(c-2.64,-5.848) -0.844,-7.644 -1.1,-7.9 ccw(c-0.134,-8.866) -1.5,-8.866 MCU.U.5.34
  Top Layer w0.4: RTS.Ra.8.3 -3.4,3.748 ; RTS.U.7.6 cw(c-3.28,2.535) -3.4,2.535 -3.4,3.748 ; RTS.Ra.8.4 -2.656,5.544 ccw(c-0.86,3.748) -3.4,3.748
NetMCU.U.5_35: MCU.U.5.35 RTS.Ra.8.1 RTS.Ra.8.2 RTS.U.7.7 | length 21.5
  Top Layer w0.2: RTS.U.7.7 ccw(c-3.15,2.45) -4.2,1.4 -4.112,1.312 ccw(c-3.6,1.824) -3.6,1.1 cw(c-3.6,-0.107) -2.746,0.746 -1.244,-0.756 cw(c-3.04,-2.552) -0.5,-2.552 -0.5,-5.748 cw(c-3.04,-5.748) -1.244,-7.544 -1.4,-7.7 ccw(c-0.193,-8.907) -1.9,-8.907 MCU.U.5.35
  Top Layer w0.4: RTS.Ra.8.1 cw(c-5.881,4.719) -4.635,4.719 -4.635,4.55 ; RTS.U.7.7 -4.635,4.55 ; RTS.Ra.8.2 ccw(c-3.15,4.55) -4.635,4.55
NetMCU.U.5_46: MCU.U.5.46 USB.R.6.2 | length 28.2
  Top Layer w0.2: MCU.U.5.46 -4.952,-14.37 ccw(c-4.952,-13.448) v1(-4.3,-14.1)
  Top Layer w0.4: v1(-0.2,10) USB.R.6.2
  Bottom Layer w0.4: v1(-4.3,-14.1) -4.1,-13.9 -4.1,-10.307 cw(c-2.393,-10.307) -3.6,-9.1 -0.644,-6.144 ccw(c-2.44,-4.348) 0.1,-4.348 0.1,9.276 ccw(c-0.924,9.276) v1(-0.2,10)
NetMCU.U.5_47: MCU.U.5.47 USB.R.7.2 | length 29.7
  Top Layer w0.2: MCU.U.5.47 -4.855,-14.77 cw(c-4.855,-15.555) v1(-4.3,-15)
  Top Layer w0.4: USB.R.7.2 -2.2,10.798 -2.2,10.7 v1(-1.2,9.7)
  Bottom Layer w0.4: v1(-4.3,-15) cw(c-4.3,-14.517) -4.641,-14.859 -4.9,-14.6 cw(c-4.659,-14.359) -5,-14.359 -5,-13.341 cw(c-4.659,-13.341) -4.9,-13.1 ccw(c-5.383,-12.617) -4.7,-12.617 -4.7,-10.39 cw(c-2.31,-10.39) -4,-8.7 -1.144,-5.844 ccw(c-2.94,-4.048) -0.4,-4.048 -0.4,7.848 ccw(c-2.94,7.848) -1.144,9.644 v1(-1.2,9.7)
NetUSB.FB.1_1: USB.FB.1.1 USB.J.3.2 USB.J.3.11 USB.Z.1.4 USB.Z.1.5 | length 13.7
  Top Layer w0.5: USB.Z.1.5 -5.448,15.63 cw(c-5.448,16.552) -6.1,15.9 -6.714,16.514 ccw(c-7,16.227) -6.801,16.58 ccw(c-7,16.227) USB.FB.1.1 ccw(c-8.569,18.201) -6.35,18.201 USB.J.3.11 -6.35,19.896 cw(c-5.496,19.896) -6.1,20.5 cw(c-4.893,19.293) -4.893,21 -2.766,21 cw(c-2.766,19.634) -1.8,20.6 cw(c-2.162,20.238) -1.65,20.238 USB.J.3.2
  Top Layer w0.55: USB.FB.1.1@-6.801,16.58 USB.Z.1.4
NetUSB.FB.2_1: USB.FB.2.1 USB.J.3.5 USB.J.3.8 USB.Z.1.3 | length 8.6
  Top Layer w0.27: USB.J.3.8 -4.75,19.838 cw(c-4.238,19.838) -4.6,20.2 cw(c-4.359,19.959) -4.359,20.3 -3.641,20.3 cw(c-3.641,19.959) -3.4,20.2 cw(c-3.762,19.838) -3.25,19.838 USB.J.3.5 -3.25,18.632 ccw(c-0.71,18.632) -2.506,16.836 USB.Z.1.3
  Top Layer w0.55: USB.Z.1.3 0.246,16.58 ccw(c0.246,16.657) USB.FB.2.1
NetUSB.FB.2_2: USB.FB.2.2 USB.R.6.1 | length 1.6
  Top Layer w0.6: USB.R.6.1 ccw(c-1.407,14.31) 0.3,14.31 USB.FB.2.2
NetUSB.FB.3_1: USB.FB.3.1 USB.J.3.6 USB.J.3.7 USB.Z.1.1 | length 8.9
  Top Layer w0.27: USB.J.3.7 USB.J.3.6 -3.75,18.104 cw(c-4.604,18.104) -4,17.5 ccw(c-3.517,17.017) -4.2,17.017 -4.2,15.383 ccw(c-3.517,15.383) -4,14.9 ccw(c-3.469,15.431) -3.469,14.68 USB.Z.1.1
  Top Layer w0.55: USB.Z.1.1 -2.25,12.927 ccw(c-2.071,12.927) USB.FB.3.1
NetUSB.FB.3_2: USB.FB.3.2 USB.R.7.1 | length 2
  Top Layer w0.6: USB.R.7.1 USB.FB.3.2
NetUSB.J.3_3: USB.J.3.3 USB.Ra.1.5 USB.Ra.1.6 | length 13.1
  Top Layer w0.27: USB.Ra.1.5 -11.366,19.3 ccw(c-11.366,20.666) v1(-10.4,19.7) ccw(c-11.366,18.734) -11.366,20.1 USB.Ra.1.6 ; v1(-2.3,18.2) ccw(c-2.421,18.321) -2.25,18.321 USB.J.3.3
  Bottom Layer w0.4: v1(-10.4,19.7) -8.844,18.144 ccw(c-7.048,19.94) -7.048,17.4 -4.152,17.4 ccw(c-4.152,19.94) -2.356,18.144 v1(-2.3,18.2)
NetUSB.J.3_9: USB.J.3.9 USB.Ra.1.7 USB.Ra.1.8 | length 11.2
  Top Layer w0.27: USB.Ra.1.7 -11.366,20.9 ccw(c-11.366,22.266) v1(-10.4,21.3) ccw(c-11.366,20.334) -11.366,21.7 USB.Ra.1.8 ; v1(-5.5,18.2) ccw(c-6.104,18.804) -5.25,18.804 USB.J.3.9
  Bottom Layer w0.4: v1(-10.4,21.3) -6.924,21.3 cw(c-6.924,20.276) -6.2,21 cw(c-7.89,19.31) -5.5,19.31 v1(-5.5,18.2)
pads on no net: MCH.FID.1.1 MCH.FID.2.1 MCU.U.5.24 MCU.U.5.25 REG.U.3.4 RTS.U.7.3 RTS.U.7.5 USB.J.3. USB.J.3.4 USB.J.3.10 USB.Z.1.6

## Polygon pours and split planes (outlines as drawn)
GND on Top Layer "GND_L01_P002" (solid, remove dead copper, pour order 2): -30,26 9,26 9,-27 -30,-27
3V3 on Top Layer "3V3_L01_P000" (solid, remove dead copper, pour order 0): -9.5,14.7 -8.8,14 -8.8,12.5 -9.4,11.9 -13.8,11.9 -15.2,13.3 -15.2,14.2 -14.7,14.7
GND on Plane 2 "GND_L03_P004" (solid, remove dead copper, pour order 4): -30,26 9,26 9,-27 -30,-27
3V3 on Plane 2 "3V3_L03_P001" (solid, remove dead copper, pour order 1): -21.6,8.7 -21.6,-13.8 -12.4,-23 1.7,-23 4.9,-19.8 4.9,-12.6 1,-8.7 1,8 -6,15 -15.3,15
GND on Plane 1 "GND_L02_P003" (solid, remove dead copper, pour order 3): -30,26 9,26 9,-27 -30,-27
GND on Bottom Layer "GND_L04_P005" (solid, remove dead copper, pour order 5): -30,26 9,26 9,-27 -30,-27

## Keep-outs
Keep-Out Layer:
  region: -3.2,-21.9 cw(c-3.2,-23) -2.1,-23 -9.9,-23 cw(c-8.8,-23) -8.8,-21.9
  region: -26.747,13 -25.588,13 cw(c-4,0) -18.227,20.8 -18.809,21.613 ccw(c-4,0)

## Silkscreen, mask and mechanical layers (free items; w line width, h text height)
Top Overlay:
  lines w0.2: -27.8,-1 -27.8,4.8 ; -26.5,6.6 cw(c-25.4,6.6) -25.4,7.7 -25.2,7.7 cw(c-25.2,6.6) -24.1,6.6 ; -22.8,-5.8 -22.8,-8.4 -22,-8.4 -22,-1.6 ccw(c-22.6,-1.6) -22.467,-1.015 cw(c-22.4,-0.723) -22.7,-0.723 -22.7,4.8
  text "ScrollWheel R1.001" at -10.5,9 h2.4 r270
  text "BOOT / LOADER" at -21.5,-6 h2 r270
Bottom Overlay:
  text "Licensed under the / CERN-OHL-S v2 / Copyright Ploopy  / 2025" at 8.3,-20.2 h2
Board Outline:
  lines w0.2: -29,-7.031 ccw(c-24,-7.031) -28.717,-8.69 ccw(c-4,0) -16.548,-23 8.175,-23 ccw(c6,-20.934) 9,-20.934 9,-12.669 ccw(c6,-12.669) 5.451,-9.72 cw(c5.121,-7.951) 5.262,-9.745 cw(c5.105,-7.746) 3.1,-7.746 3.1,7.746 cw(c5.105,7.746) 5.262,9.745 cw(c5.121,7.951) 5.451,9.72 ccw(c6,12.669) 9,12.669 9,20.934 ccw(c6,20.934) 7.293,23.641 ccw(c-4,0) 1.802,25.55 -9.802,25.55 ccw(c-4,0) -28.717,8.69 ccw(c-24,7.031) -29,7.031 -29,-0.5 ccw(c-28,-0.5) -28,-1.5 -24,-1.5 cw(c-24,-2.5) -23,-2.5 -23,-4.8 cw(c-24,-4.8) -24,-5.8 -28,-5.8 ccw(c-28,-6.8) -29,-6.8 -29,-7.031 ; -14.478,-9.133 ccw(c-13.121,-7.951) -13.262,-9.745 ccw(c-13.105,-7.746) -11.1,-7.746 -11.1,7.746 ccw(c-13.105,7.746) -13.262,9.745 ccw(c-13.121,7.951) -14.478,9.133 ccw(c-4,0) -14.478,-9.133

## Text inside footprints (layer, text, board x,y; h text height)
MCH.LOGO.2: Top Overlay "X" at 0.799,0.2 h1.4